# EAGLE board CC2533_PCB_Main (EAGLE 6.4)
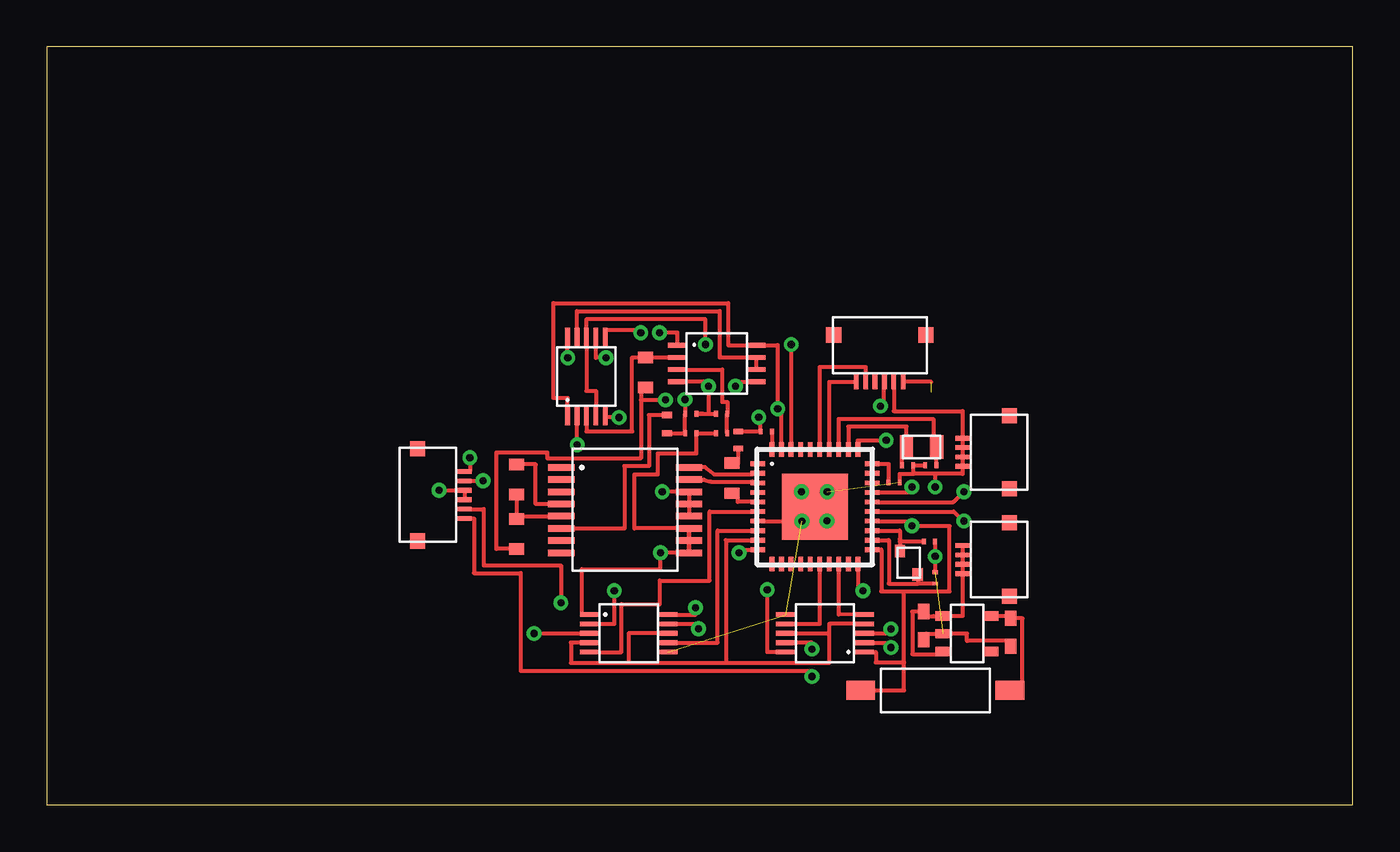
[diagram p0: board, top side]
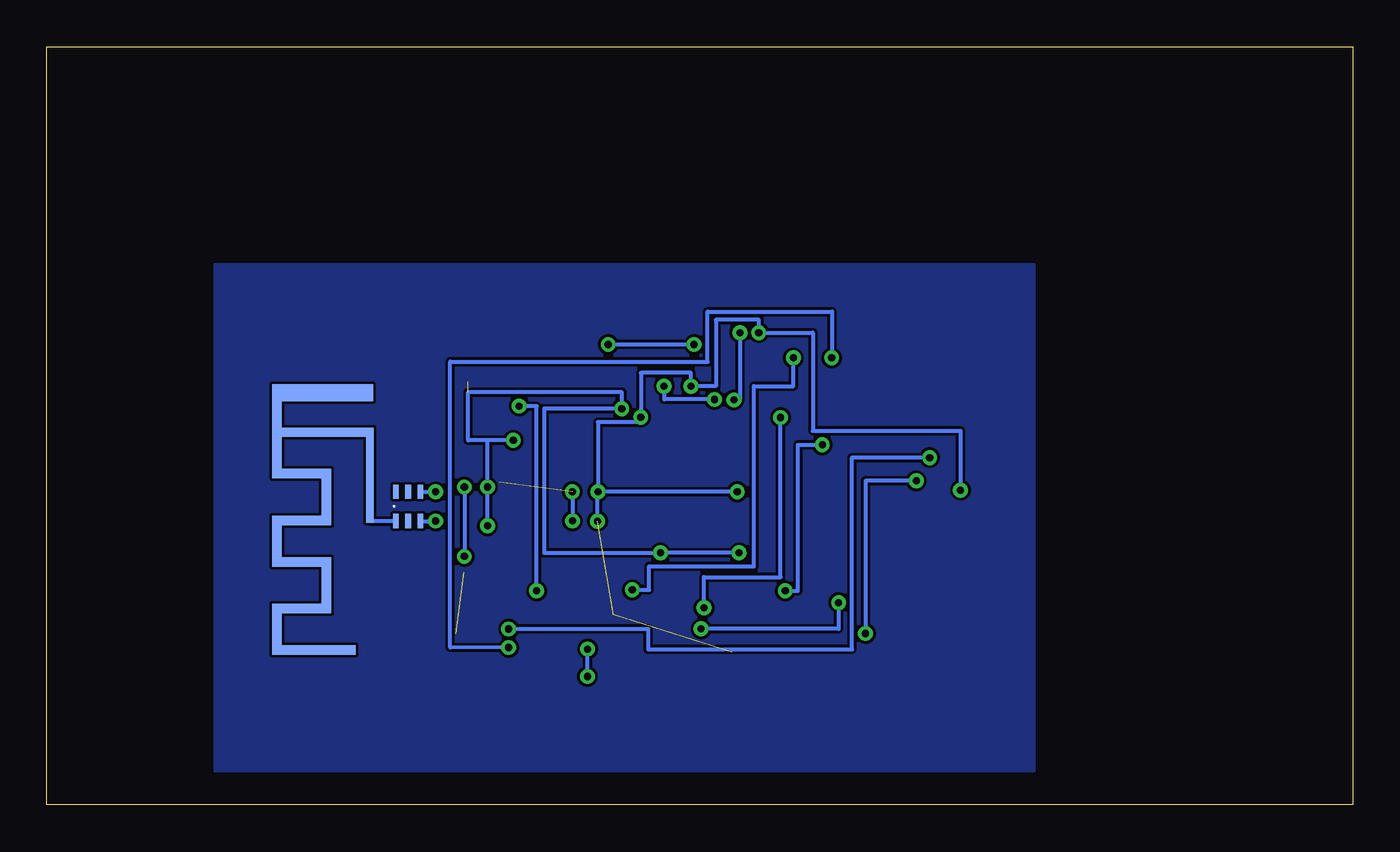
[diagram p1: board, bottom side, seen from below]

Size 69.52 x 40.33 mm. Coordinates in mm from the lower left corner, seen from the top.
Outline: 0,0 69.52,0 69.52,40.33 0,40.33 0,0
Copper layers (1*16): Top 0.035mm / dielectric 1.5mm / Bottom 0.035mm
Design rules "default *": minimum track width 8mil, minimum drill 15mil, track to track 6mil, track to pad 6mil, pad to pad 6mil, via to via 6mil, smd to smd 6mil, copper to edge 40mil, drill to drill 8mil, minimum pad ring 10mil, minimum via ring 8mil, stop-mask expansion 4mil, vias tented up to drill 0mil, thermal gap 10mil

## Footprints (pad centres in the part's own frame; a part is rotated, then mirrored left to right if it is on the bottom)
CC2533 = smd 0.762 x 0.254: AVDD1 3.048,1.27; AVDD2 3.048,0.762; AVDD3 3.048,-0.762; AVDD4 3.048,1.778; AVDD5 3.048,-2.286; DVDD2 -3.048,-2.286; NC1 -3.048,2.286; NC2 -3.048,0.762; P1_1 -3.048,-1.778; P1_2 -3.048,-1.27; P1_3 -3.048,-0.762; P1_4 -3.048,-0.254; P1_5 -3.048,0.254; RBIAS 3.048,2.286; RF_N 3.048,0.254; RF_P 3.048,-0.254; SCL -3.048,1.778; SDA -3.048,1.27; XOSC_Q1 3.048,-1.778; XOSC_Q2 3.048,-1.27 | smd 0.254 x 0.762: AVDD6 2.286,3.048; DCOUPL -2.286,3.048; DVDD1 -1.778,3.048; P0_0 1.778,-3.048; P0_1 1.27,-3.048; P0_2 0.762,-3.048; P0_3 0.254,-3.048; P0_4 -0.254,-3.048; P0_5 -0.762,-3.048; P0_6 -1.27,-3.048; P0_7 -1.778,-3.048; P1_0 -2.286,-3.048; P1_6 -1.27,3.048; P1_7 -0.762,3.048; P2_0 -0.254,3.048; P2_1 0.254,3.048; P2_2 0.762,3.048; P2_3/XOSC32K_Q2 1.27,3.048; P2_4/XOSC32K_Q1 1.778,3.048; RESET_N 2.286,-3.048 | smd 3.5 x 3.5: GND0 0,0
BALUN = smd 0.75 x 0.3: BALANCED3 -0.782,-0.655; BALANCED4 0.768,-0.655; GND2 -0.782,-0.005; GND5 0.768,-0.005; GND6 0.768,0.645; UNBALANCED -0.782,0.645
X32MHZ = smd 0.55 x 0.65: Q1 0.496,-0.576; Q2 -0.454,0.674
0201 = smd 0.203 x 0.3: 1 -0.3,-0.001; 2 0.3,-0.001
ANTENNA_BOTTOM = smd 0.203 x 0.203 bottom: A -0.014,-0.096 | smd 0.381 x 4.589 bottom: A1 -0.014,2.097 | smd 0.5 x 0.9 bottom: P$3 0.059,6.728 | smd 4.4 x 0.9 bottom: P$4 2.509,6.727 | smd 0.5 x 5 bottom: P$5 4.945,4.677 | smd 2.65 x 0.5 bottom: P$6 3.37,2.426; P$12 3.375,-2.271; P$14 3.372,-4.76 | smd 0.5 x 2 bottom: P$7 2.296,1.179; P$13 2.299,-3.512 | smd 4.4 x 0.5 bottom: P$8 2.495,4.627 | smd 0.5 x 2.7 bottom: P$9 4.948,-1.171; P$15 4.945,-5.861 | smd 3.94 x 0.5 bottom: P$10 2.725,-6.962 | smd 2.667 x 0.5 bottom: P$11 3.381,-0.071 | smd 0.5 x 0.5 bottom: P$16 0.045,4.627
FFC4POS = smd 0.762 x 0.254: 1 0.04,0.742; 2 0.04,0.242; 3 0.04,-0.258; 4 0.04,-0.758 | smd 0.8 x 0.8: P$5 -2.46,1.94; P$6 -2.46,-1.96
REGULATOR = smd 0.5 x 0.8: 1 0.94,1.275; 2 0,1.275; 3 -0.95,1.275; 4 -0.95,-1.275; 5 0.95,-1.275
0603 = smd 0.8 x 0.6: 1 -0.751,0; 2 0.749,0
SPDT_DUAL = smd 1.05 x 0.25: COM1 -2.075,0; COM2 2.075,0.5; GND 2.075,-1; IN1 -2.075,-0.5; IN2 2.075,0; NC1 -2.075,-1; NC2 2.075,-0.5; NO1 -2.075,0.5; NO2 2.075,1; V+ -2.075,1
AD5933 = smd 1.4 x 0.35: AGND1 3.45,0.25; AGND2 3.45,0.9; AVDD1 3.45,-1.7; AVDD2 3.45,-1.05; DGND 3.45,-0.4; DVDD 3.45,-2.35; MCLK -3.35,-2.35; NC1 -3.35,2.2; NC2 -3.35,1.55; NC3 -3.35,0.9; NC7 -3.35,-1.7; RFB -3.35,0.25; SCL 3.45,2.2; SDA 3.45,1.55; VIN -3.35,-0.4; VOUT -3.35,-1.05
FFC6POS = smd 0.762 x 0.254: 1 0.008,1.269; 2 0.008,0.769; 3 0.008,0.269; 4 0.008,-0.231; 5 0.008,-0.731; 6 0.008,-1.231 | smd 0.8 x 0.8: P$7 -2.49,2.47; P$8 -2.49,-2.43
SWITCH_MANUAL = smd 1.524 x 1.016: 1 -4.13,0; 2 3.81,0
AD8606_OPAMP = smd 1 x 0.25: +INA -2.1,-0.325; +INB 2.1,-0.975; -INA -2.1,0.325; -INB 2.1,-0.325; OUTA -2.1,0.975; OUTB 2.1,0.325; V+ 2.1,0.975; V- -2.1,-0.975
0603_RES = smd 0.6 x 0.8: 1 -0.8,0; 2 0.8,0
0402_CAP = smd 0.33 x 0.533: 1 -0.475,0.001; 2 0.501,0.001
0402 = smd 0.3 x 0.5: 1 -0.45,0.001; 2 0.45,0.001
X32.768KHZ = smd 1.25 x 0.7: Q1 0.009,-0.811; Q2 0.009,0.789

## Placement (x,y rotation side)
U$1  CC2533  [CC2533]  40.89,15.85 0 top
U$2  BALUN  [BALUN]  50.29,15.88 90 bottom
U$3  X32MHZ  [X32MHZ]  45.87,12.83 0 top
U$4  0201  [0201]  47.29,12.06 90 top
U$5  0201  [0201]  46.99,14 0 top
U$6  ANTENNA_BOTTOM  [ANTENNA_BOTTOM]  52.34,15.19 0 top
U$7  FFC4POS  [FFC4POS]  48.79,13.03 180 top
U$8  FFC4POS  [FFC4POS]  48.79,18.75 180 top
U$9  56k  [0201]  45.11,17.14 0 top
U$10  REGULATOR  [REGULATOR]  49,9.09 90 top
U$11  0603  [0603]  51.31,9.17 270 top
U$12  0603  [0603]  46.69,9.53 270 top
U$13  SPDT_DUAL  [SPDT_DUAL]  41.43,9.11 180 top
U$14  0201  [0201]  38.3,19.85 180 top
U$15  SPDT_DUAL  [SPDT_DUAL]  30.98,9.11 0 top
U$16  AD5933  [AD5933]  30.73,15.75 0 top
U$17  FFC6POS  [FFC6POS]  44.32,22.5 270 top
U$18  SWITCH_MANUAL  [SWITCH_MANUAL]  47.15,6.08 180 top
U$19  SPDT_DUAL  [SPDT_DUAL]  28.72,22.78 90 top
U$20  AD8606_OPAMP  [AD8606_OPAMP]  35.67,23.48 0 top
U$21  0603_RES  [0603_RES]  24.99,17.3 270 top
U$22  0603_RES  [0603_RES]  25,14.4 270 top
U$23  0603_RES  [0603_RES]  31.88,23 270 top
U$24  0201  [0201]  35.92,19.76 0 top
U$25  0201  [0201]  35.92,20.81 0 top
U$26  0402_CAP  [0402_CAP]  33.02,20.26 270 top
U$27  0201  [0201]  34.28,19.76 0 top
U$28  0201  [0201]  34.28,20.81 0 top
U$29  0603_RES  [0603_RES]  36.48,17.37 90 top
U$30  FFC6POS  [FFC6POS]  22.23,16.46 0 top
U$31  0402  [0402]  36.8,19.41 90 top
U$39  X32.768KHZ  [X32.768KHZ]  46.58,19.05 270 top
U$40  0201  [0201]  47.07,18.06 180 top
U$41  0201  [0201]  45.82,18.06 0 top

## Library data of the parts
U$1 U$2 U$6-U$8 U$10 U$13 U$15-U$20 U$23 U$29 U$30 U$39-U$41 = CC2530_PCB_TL
U$3 = CC2530_PCB_TL; X: 32MHz
U$4 U$5 = CC2530_PCB_TL; CAP: 20pF
U$9 = CC2530_PCB_TL; R_BIAS: 56k
U$11 = CC2530_PCB_TL; CAP: +2.2uF-
U$12 = CC2530_PCB_TL; CAP: +1uF-
U$14 = CC2530_PCB_TL; CAP: 0.47uF
U$21 U$22 = CC2530_PCB_TL; RES: 20k
U$24 U$25 U$27 U$28 = CC2530_PCB_TL; RES: 49.9k
U$26 = CC2530_PCB_TL; CAP: 0.047uF
U$31 = CC2530_PCB_TL; RES: 1k

## Nets
GND: U$1.GND0 U$1.P1_3 U$4.2 U$5.2 U$8.1 U$8.2 U$8.3 U$8.4 U$9.2 U$10.2 U$11.2 U$12.2 U$13.GND U$14.2 U$15.GND U$16.AGND1 U$16.AGND2 U$16.DGND U$17.2 U$19.GND U$20.V- U$25.1 U$28.2 U$30.3 U$30.4 U$31.2 U$40.2 U$41.2
GND2: U$2.GND2
GND5: U$2.GND5
GND6: U$2.GND6
IN1: U$1.P1_1 U$13.IN1 U$13.IN2 U$15.IN1 U$15.IN2
IN2: U$1.P1_6 U$19.IN1 U$19.IN2
LEFT: U$1.P1_4 U$15.NC1
N$1: U$1.RF_N U$2.BALANCED4
N$2: U$1.RF_P U$2.BALANCED3
N$3: U$2.UNBALANCED U$6.A
N$4: U$1.XOSC_Q2 U$3.Q2 U$5.1
N$5: U$1.XOSC_Q1 U$3.Q1 U$4.1
N$6: U$16.RFB U$21.1
N$7: U$15.NO1 U$19.NO1
N$8: U$15.NO2 U$19.NC1
N$9: U$13.COM1 U$30.1
N$10: U$13.COM2 U$30.6
N$11: U$19.COM1 U$20.-INA U$23.1
N$12: U$1.RBIAS U$9.1
N$13: U$1.SCL U$16.SCL
N$14: U$1.SDA U$16.SDA
N$15: U$15.COM1 U$30.2
N$16: U$1.P2_4/XOSC32K_Q1 U$39.Q1 U$41.1
N$17: U$1.P2_1 U$17.5
N$18: U$1.DCOUPL U$14.1
N$19: U$16.VOUT U$26.1
N$20: U$1.P2_2 U$17.6
N$21: U$10.5 U$11.1 U$18.1
N$22: U$1.P2_3/XOSC32K_Q2 U$39.Q2 U$40.1
N$23: U$16.VIN U$21.2 U$22.1
N$24: U$1.P1_5 U$29.1
N$25: U$20.OUTA U$22.2 U$23.2
N$27: U$20.+INA U$24.2 U$25.2
N$28: U$20.+INB U$26.2 U$27.1 U$28.1
N$29: U$19.COM2 U$20.-INB U$20.OUTB
N$30: U$15.COM2 U$30.5
N$31: U$13.NO1 U$19.NO2
N$32: U$13.NO2 U$19.NC2
N$34: U$29.2 U$31.1
NC1: U$1.NC1
NC2: U$1.NC2
P0_1: U$1.P0_1 U$13.NC1
P0_3: U$1.P0_3 U$13.NC2
RESET: U$1.RESET_N U$17.3
RIGHT: U$1.P1_2 U$15.NC2
V+: U$7.1 U$7.2 U$7.3 U$7.4 U$10.1 U$10.3 U$12.1
VDD: U$1.AVDD1 U$1.AVDD2 U$1.AVDD3 U$1.AVDD4 U$1.AVDD5 U$1.AVDD6 U$1.DVDD1 U$1.DVDD2 U$13.V+ U$15.V+ U$16.AVDD1 U$16.AVDD2 U$16.DVDD U$17.1 U$18.2 U$19.V+ U$20.V+ U$24.1 U$27.2

## Tracks (layer width: path | path; a pad name or v marks a point on that pad's centre or on a via)
GND  (via drill 0.38 pad 0.64)  (4 unrouted)
  Top 0.203: U$4.2 v47.3,13.21 U$5.2 47.3,13.94 | U$9.2 45.41,17.6 46.12,17.6 | U$40.2 46.22,18.06 U$41.2 46.12,17.6 | 47.3,17.6 48.75,17.6 U$8.1 U$8.2 U$8.3 U$8.4 48.76,20.94 45.09,20.94 U$17.2 | 47.3,17.6 46.12,17.6 | U$12.2 46.81,9.09 U$10.2 49,9.09 49,8.71 51.31,8.71 U$11.2 | U$16.AGND1 U$16.AGND2 v32.77,16.65 | U$16.AGND1 U$16.DGND | 34.63,16 U$16.AGND1 | 33.77,22.51 U$20.V- 35.23,22.5 v35.23,22.27 35.23,20.8 | U$31.2 U$14.2 38,20.62 v37.9,20.62 | 35.23,20.8 U$28.2 34.91,20.8 | 35.23,20.8 U$25.1 | U$19.GND 29.72,25.27 31.62,25.27 v31.62,25.12 | U$30.4 U$30.3 v20.88,16.73 | U$1.P1_3 v40.2,15.09 | v40.18,16.65 v41.54,16.65 | v41.54,15.1 41.54,15.85 U$1.GND0 | 47.3,17.6 v47.3,16.9
  Bottom 0.203: v32.77,16.65 v40.18,16.65 | v40.18,16.65 40.2,16.65 v40.2,15.09 | v20.88,16.73 20.88,19.89 28.73,19.89 28.73,25.12 v31.62,25.12 31.62,25.8 33.9,25.8 33.9,22.27 v35.23,22.27 35.23,22.98 37.9,22.98 v37.9,20.62 37.9,20.36 38.2,20.36 40.18,20.36 v40.18,16.65 | v41.54,16.65 v41.54,15.1 | v47.3,16.9 47.3,13.27 v47.3,13.21
IN1
  Top 0.203: U$13.IN1 41.66,9.61 41.66,9.11 | U$1.P1_1 36.14,14.07 36.14,7.54 | U$13.IN2 41.66,9.11 | 36.14,7.54 41.66,7.54 41.66,9.11 | U$15.IN2 30.98,9.11 30.98,7.54 | U$15.IN1 27.9,8.61 27.9,7.54 30.98,7.54 | 30.98,7.54 36.14,7.54
IN2  (via drill 0.38 pad 0.64)
  Top 0.203: v39.63,24.49 U$1.P1_6 | U$19.IN1 29.23,21.01 29.23,22.02 28.72,22.02 U$19.IN2 28.72,25.83 35.06,25.83 v35.06,24.49
  Bottom 0.203: v39.63,24.49 v35.06,24.49
LEFT
  Top 0.203: U$15.NC1 30.58,8.11 30.58,10.67 32.64,10.67 32.64,11.92 35.28,11.92 35.28,15.59 U$1.P1_4
N$1  (via drill 0.38 pad 0.64)
  Top 0.203: U$1.RF_N 48.26,16.1 v48.82,16.64
  Bottom 0.203: 49.64,16.66 U$2.BALANCED4 v48.82,16.64
N$2  (via drill 0.38 pad 0.64)
  Top 0.203: U$1.RF_P 48.28,15.6 v48.82,15.09
  Bottom 0.203: 49.64,15.06 U$2.BALANCED3 v48.82,15.09
N$3
  Bottom 0.203: U$2.UNBALANCED U$6.A | U$6.A
N$4
  Top 0.203: U$1.XOSC_Q2 45.41,14.58 45.41,14.12 45.42,14.12 U$3.Q2 45.42,13.99 U$5.1
N$5
  Top 0.203: U$1.XOSC_Q1 44.83,14.07 44.83,11.76 46.37,11.76 | U$4.1 46.37,11.76 | U$3.Q1 46.37,11.76
N$6
  Top 0.203: U$16.RFB 26.02,16 26.02,18.11 U$21.1
N$7  (via drill 0.38 pad 0.64)
  Top 0.203: U$15.NO1 30.21,9.61 v30.21,11.38 | v28.23,19.15 28.23,21.01 U$19.NO1
  Bottom 0.203: v30.21,11.38 29.54,11.38 29.54,19.15 v28.23,19.15
N$8  (via drill 0.38 pad 0.64)
  Top 0.203: U$15.NO2 34.53,10.11 v34.53,10.47 | v30.45,20.61 29.74,20.6 U$19.NC1
  Bottom 0.203: v34.53,10.47 34.53,12.1 30.45,12.1 v30.45,20.61
N$9  (via drill 0.38 pad 0.64)
  Top 0.203: U$13.COM1 44.93,9.11 v44.93,9.35 | v22.52,18.47 22.52,17.73 U$30.1
  Bottom 0.203: v44.93,9.35 37.51,9.35 37.51,8.26 26.64,8.26 26.64,18.47 v22.52,18.47
N$10  (via drill 0.38 pad 0.64)
  Top 0.203: U$30.6 22.73,15.23 22.73,12.32 25.22,12.32 25.22,7.11 40.74,7.11 v40.74,6.82 | v40.73,8.28 40.73,8.61 U$13.COM2
  Bottom 0.203: v40.74,6.82 40.74,8.13 v40.73,8.28
N$11
  Top 0.203: U$20.-INA 31.73,23.8 U$23.1 31.16,23.8 31.16,19.86 28.72,19.86 U$19.COM1
N$12
  Top 0.203: U$1.RBIAS 44.81,18.14 U$9.1
N$13
  Top 0.203: U$1.SCL 37.55,17.63 37.55,17.56 35.55,17.56 35.02,17.96 34.63,17.96 U$16.SCL
N$14
  Top 0.203: U$16.SDA 34.97,17.29 35.36,17.19 37.54,17.19 37.59,17.11 U$1.SDA
N$15  (via drill 0.38 pad 0.64)
  Top 0.203: U$30.2 23.2,17.23 v23.23,17.23 | v25.93,9.11 U$15.COM1
  Bottom 0.203: v23.23,17.23 25.93,17.23 v25.93,9.11
N$16
  Top 0.203: U$41.1 45.52,19.04 U$39.Q1 45.77,20.12 42.67,20.12 U$1.P2_4/XOSC32K_Q1
N$17
  Top 0.203: U$1.P2_1 41.15,23.29 43.59,23.29 U$17.5
N$18
  Top 0.203: U$14.1 U$1.DCOUPL
N$19
  Top 0.203: U$26.1 32.05,20.73 32.05,18.01 30.75,18.01 30.75,14.69 27.83,14.69 U$16.VOUT
N$20
  Top 0.203: U$1.P2_2 41.66,22.5 U$17.6
N$21
  Top 0.203: U$10.5 51.31,10.04 U$11.1 51.31,9.91 51.94,9.91 51.94,6.1 51.28,6.1 U$18.1
N$22
  Top 0.203: U$40.1 U$39.Q2 | U$1.P2_3/XOSC32K_Q2 42.16,20.52 47.19,20.52 47.19,19.04 U$39.Q2 | U$39.Q2
N$23
  Top 0.203: U$16.VIN 25,15.35 U$22.1 U$21.2
N$24
  Top 0.203: U$1.P1_5 36.79,16.11 36.79,16.57 U$29.1
N$25  (via drill 0.38 pad 0.64)
  Top 0.203: U$22.2 23.94,13.6 23.94,18.75 26.64,18.75 26.64,18.44 31.62,18.44 31.62,22.2 U$23.2 31.63,22.2 31.63,21.54 v32.94,21.54 | U$20.OUTA 33.57,25.12 v32.62,25.12
  Bottom 0.203: v32.62,25.12 32.62,21.54 v32.94,21.54
N$26
  pour Bottom: 16.94,28.72 60.56,28.72 60.56,1.82 16.96,1.82 16.96,28.71
N$27
  Top 0.203: U$24.2 U$25.2 36.23,21.43 35.96,21.43 35.96,23.15 U$20.+INA
N$28  (via drill 0.38 pad 0.64)
  Top 0.203: U$26.2 U$27.1 U$28.1 v33.98,21.56 | v36.66,22.27 36.66,22.5 U$20.+INB
  Bottom 0.203: v33.98,21.56 36.66,21.56 | v36.66,22.27 36.66,21.56 | 36.66,21.56
N$29
  Top 0.203: U$20.-INB U$20.OUTB 35.81,23.8 35.81,26.26 28.22,26.26 U$19.COM2
N$30  (via drill 0.38 pad 0.64)
  Top 0.203: U$15.COM2 34.68,9.61 v34.69,9.35 | U$30.5 23.25,15.73 23.25,12.74 27.37,12.74 v27.37,10.74
  Bottom 0.203: v27.37,10.74 27.37,9.35 v34.69,9.35
N$31  (via drill 0.38 pad 0.64)
  Top 0.203: U$13.NO1 44.93,8.61 v44.93,8.36 | v27.73,23.78 27.73,25.16 U$19.NO2
  Bottom 0.203: v44.93,8.36 48.05,8.36 48.05,23.57 34.34,23.56 34.34,26.24 27.72,26.24 v27.73,23.78
N$32  (via drill 0.38 pad 0.64)
  Top 0.203: U$13.NO2 38.35,8.11 v38.35,11.43 | v29.77,23.78 29.23,23.78 29.23,25.16 U$19.NC2
  Bottom 0.203: v38.35,11.43 37.45,11.43 37.45,12.68 31.88,12.68 31.88,22.28 29.77,22.28 v29.77,23.78
N$34
  Top 0.203: U$31.1 36.8,18.17 U$29.2
P0_1
  Top 0.203: 42.19,12.8 U$1.P0_1 42.16,10.12 U$13.NC1
P0_3
  Top 0.203: U$13.NC2 41.15,9.61 U$1.P0_3
RESET  (via drill 0.38 pad 0.64)
  Top 0.203: 44.6,22.5 U$17.3 44.58,22.5 44.58,21.21 v44.37,21.21 | U$1.RESET_N 43.18,11.38 v43.45,11.38
  Bottom 0.203: v43.45,11.38 43.45,21.21 v44.37,21.21
RIGHT
  Top 0.203: U$15.NC2 35.71,8.61 35.71,14.58 U$1.P1_2
V+
  Top 0.203: U$10.3 47.72,8 46.08,8 46.08,10.28 U$12.1 46.81,10.03 47.22,10.03 U$10.1 48.75,10.03 U$7.1 U$7.2 U$7.3 U$7.4
VDD  (via drill 0.38 pad 0.64)  (1 unrouted)
  Top 0.203: U$1.AVDD4 U$1.AVDD1 U$1.AVDD2 46.06,16.61 v46.06,16.9 | U$1.AVDD5 44.42,13.56 44.42,11.35 45.64,11.35 | 45.64,11.35 48.06,11.35 48.06,14.83 v46.06,14.83 46.06,15.09 U$1.AVDD3 | 45.64,7.57 45.64,6.08 U$18.2 | 45.64,7.57 45.64,11.35 | U$16.AVDD2 U$16.AVDD1 U$16.DVDD | 47.09,22.5 U$17.1 | U$16.AVDD2 U$16.DVDD | U$24.1 U$27.2 34.59,18.69 32.52,18.69 | U$16.AVDD2 31.28,14.7 31.28,17.58 32.52,17.58 32.52,18.69 | U$16.DVDD v32.66,13.4 32.66,12.53 28.48,12.53 28.48,10.11 U$15.V+ | v36.85,13.4 36.85,13.56 U$1.DVDD2 | U$13.V+ 44.13,8.11 44.13,7.57 45.64,7.57 | U$19.V+ 27.72,21.64 26.98,21.64 26.98,26.7 36.27,26.7 36.27,24.45 U$20.V+ 38.91,24.45 v38.91,21.07 39.12,21.07 U$1.DVDD1 | 32.52,18.69 | U$1.AVDD6 43.18,19.39 v44.68,19.39
  Bottom 0.203: 46.06,19.39 47.09,19.39 47.09,21.95 38.91,21.95 v38.91,21.07 43.04,21.07 43.04,13.4 v36.85,13.4 v32.66,13.4 | 46.06,19.39 v46.06,16.9 v46.06,14.83 | v44.68,19.39 46.06,19.39